# Altium PCB Dashboard_10.0.PcbDoc (part 2 of 3)
Units mm, origin at the board's own origin, x right, y up, seen from the top; angles counter-clockwise.
Board outline 113 x 67 mm, 2 copper layers (Top Layer, Bottom Layer), stack 1.671 mm thick; 178 components, 204 nets, 614 pads, 115 vias.
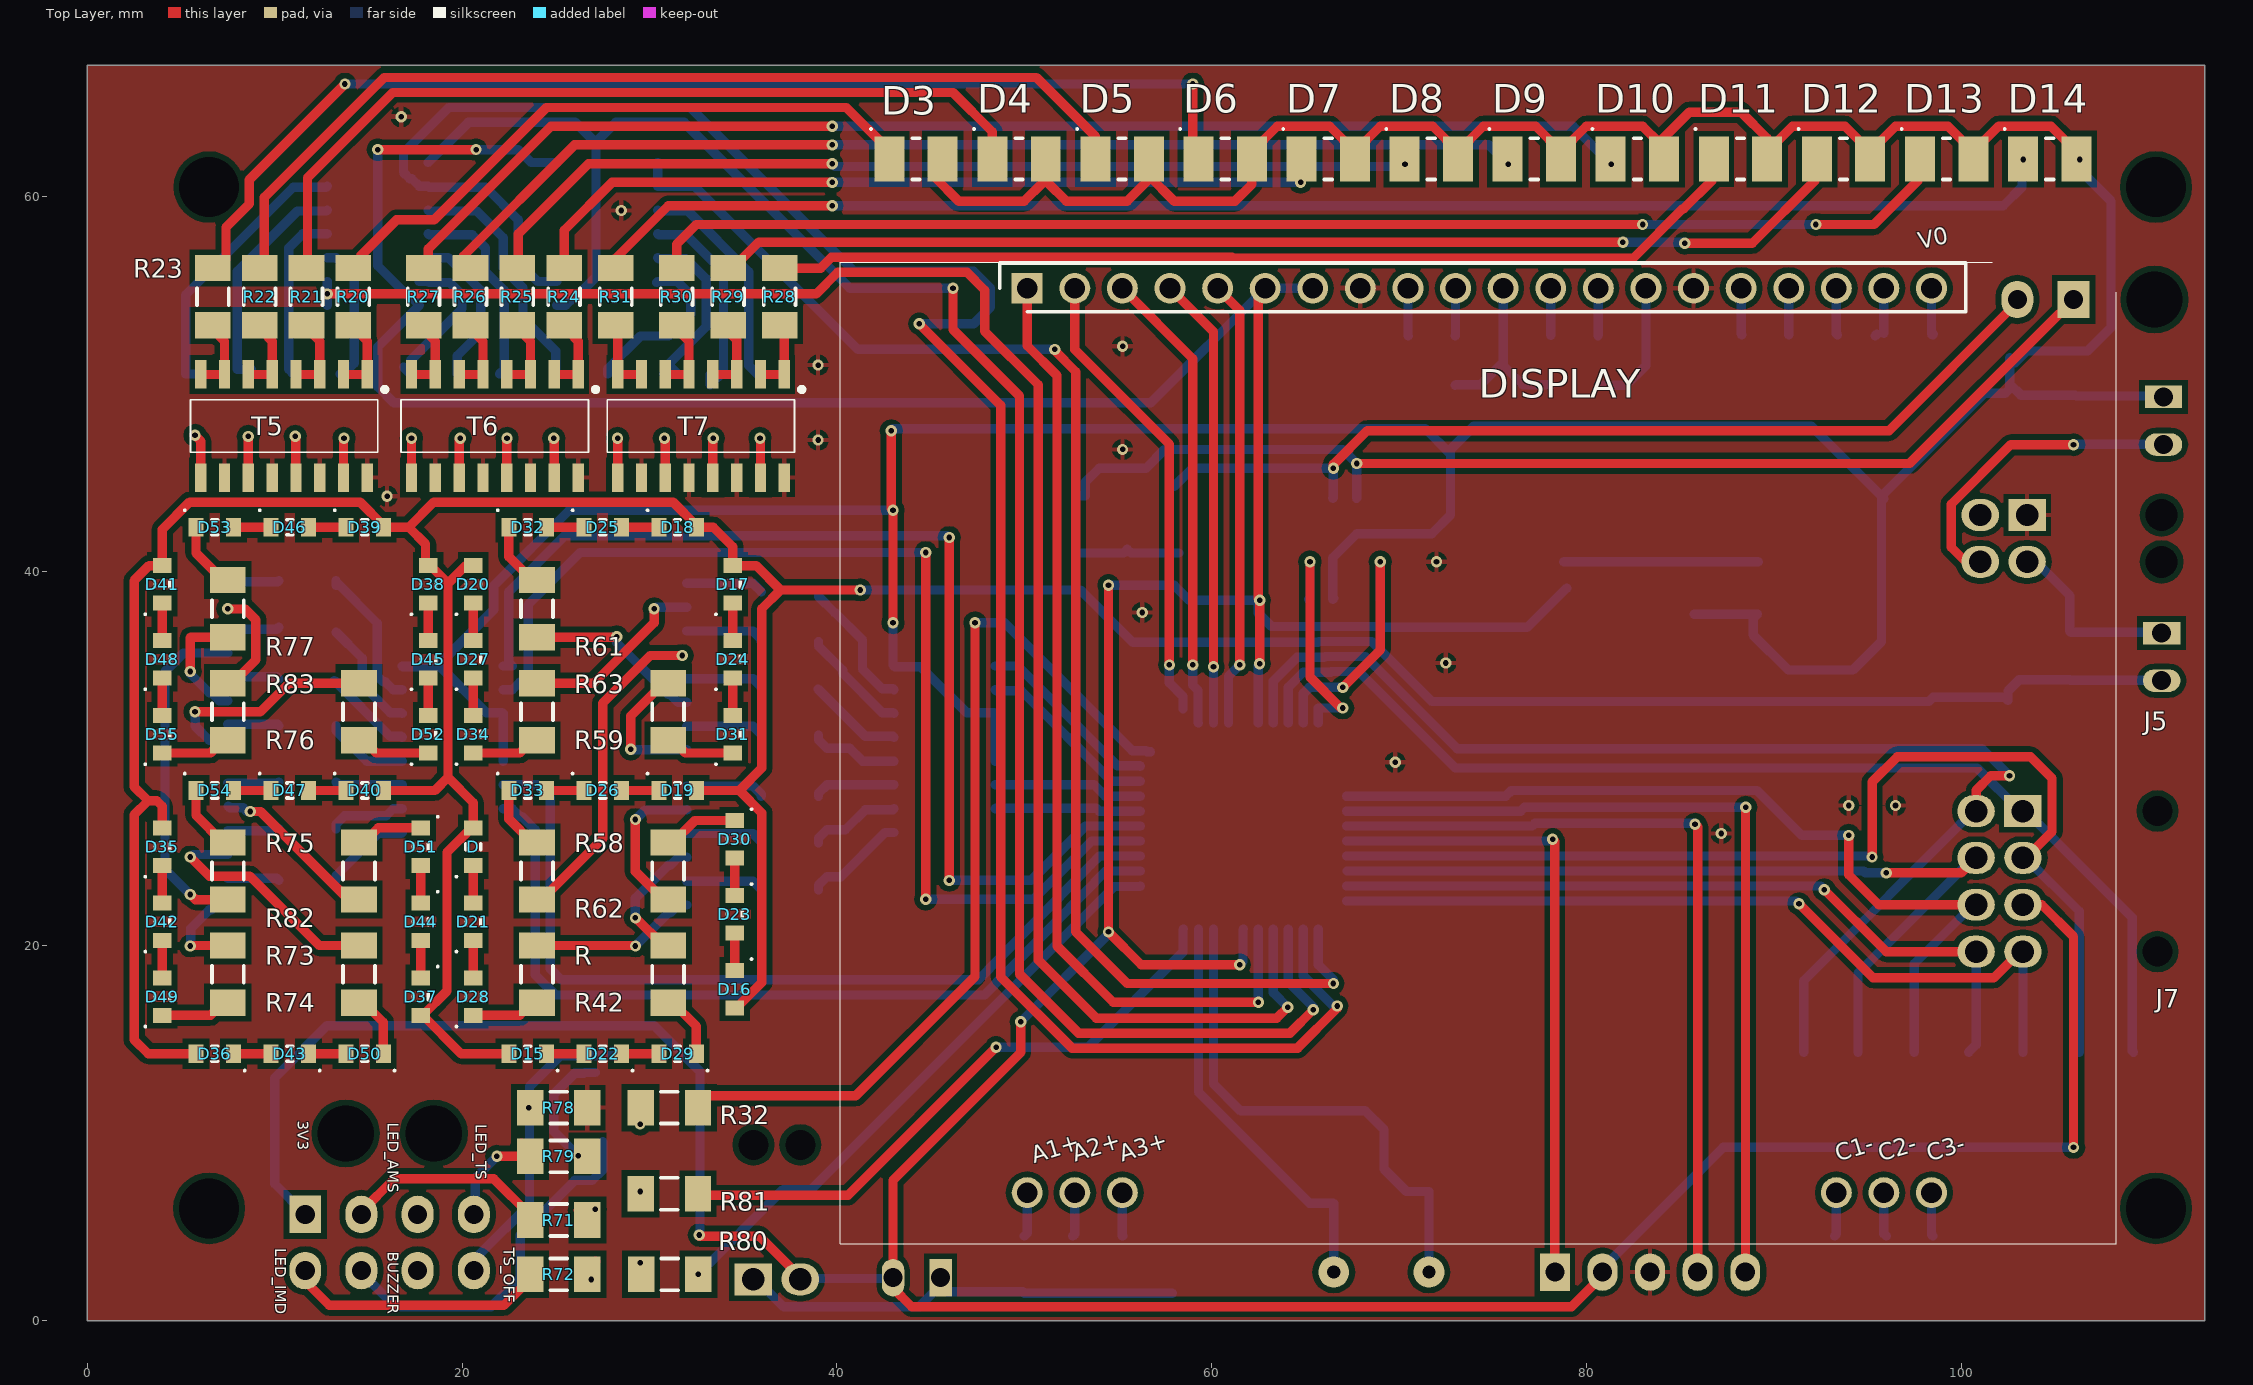
[diagram p0: Top Layer view]

## Part data (continued)
J9: library part HEADER_J9, "CONN HEADER R/A 2POS 2.5MM", Color=Black, Manufacturer 1=Molex, Supplier Part Number 1=1225083, ComponentLink1Description=http://www.farnell.com/datasheets/2221462.pdf?src-supplier=Farnell, ComponentLink1URL=http://www.farnell.com/datasheets/2221462.pdf?src-supplier=Farnell, ComponentLink2Description=http://www.farnell.com/datasheets/2059602.pdf?src-supplier=Element14, ComponentLink2URL=http://www.farnell.com/datasheets/2059602.pdf?src-supplier=Element14, ComponentLink3Description=http://www.farnell.com/datasheets/2221462.pdf?src-supplier=Newark, ComponentLink3URL=http://www.farnell.com/datasheets/2221462.pdf?src-supplier=Newark, ComponentLink4Description=https://www.molex.com/pdm_docs/sd/1053131102_sd.pdf?src-supplier=Digi-Key, ComponentLink4URL=https://www.molex.com/pdm_docs/sd/1053131102_sd.pdf?src-supplier=Digi-Key, Contact Material=Brass, Contact Plating=Gold, Gender=Male, Manufacturer Part Number 1=105313-1202, Mount="Through Hole", Number of Pins=2, Number of Rows=1, Pricing 1="10=0,81300, 50=0,47400, 200=0,46200, 500=0,45000 (EUR)", REACH SVHC=Unknown, RoHS=No, Stock 1=130, Supplier 1=RSComponents, Termination="Through Hole"
PIC18LF4685-I/PT: "IC MCU 8BIT 96KB FLASH 44TQFP", Case/Package=TQFP, Frequency=40MHz, Manufacturer 1=Microchip, Max Operating Temperature=85°C, Max Power Dissipation=1W, Max Supply Voltage=5.5V, Min Operating Temperature=-40°C, Min Supply Voltage=2V, Package Quantity=160, Supplier Part Number 1=PIC18LF4685-I/PT-ND, Access Time=40us, ComponentLink1Description=DATASHEET, ComponentLink1URL=https://datasheet.ciiva.com/9230/jp026433-9230074.pdf?src-supplier=Avnet, Core Architecture=PIC, Data Bus Width=8b, Height=1.05mm, Interface=I2C,SPI,CAN,UART,USART, Lead Free="Lead Free", Length=10mm, Manufacturer Part Number 1=PIC18LF4685-I/PT, Max Frequency=40MHz, Memory Size=96KB, Memory Type=FLASH, Mount="Surface Mount", Number of ADC Channels=11, Number of I2C Channels=1, Number of I/Os=36, Number of Pins=44, Number of Programmable I/O=44, Number of SPI Channels=1, Number of Timers/Counters=4, Number of UART Channels=1, Oscillator Type=Internal, Packaging=Tray, Peripherals="PWM,I2C,Brown-out Detect/Reset,POR,WDT,HLVD", Pricing 1="1=8,79000, 25=8,06000 (USD)", Radiation Hardening=No, RAM Size=3.25KB, REACH SVHC="No SVHC", RoHS=Yes, Stock 1=53, Supplier 1=Digi-Key, Watchdog Timer=Yes, Width=10mm
"Pickit 3": library part HEADER_J1, "Conn Unshrouded Header HDR 5 POS 2.54mm Solder RA Thru-Hole", Manufacturer 1=Samtec, Manufacturer Part Number 1=TLW-105-01-G-S-RA, Supplier Part Number 1=TLW-105-01-G-S-RA-ND, ComponentLink1Description=https://datasheet.ciiva.com/10350/mtlw-th-10350142.pdf?src-supplier=Avnet, ComponentLink1URL=https://datasheet.ciiva.com/10350/mtlw-th-10350142.pdf?src-supplier=Avnet, Contact Plating=Gold, Gender=Male, Mount="Through Hole", Number of Contacts=5, Number of Rows=1, Packaging=Bulk, Pitch=2.54mm, Pricing 1="1=1,20000 (USD)", Radiation Hardening=No, RoHS=Yes, Stock 1=950, Supplier 1=Digi-Key, Termination=Solder
R R20 R21 R22 R23 R24 R25 R26 R27 R28 R29 R30 R31 R42 R58 R59 R61 R62 R63 R71 R72 R73 R74 R75 R76 R77 R79 R82 R83 R200 R201: library part "RESISTOR 150R", "RES SMD 150 OHM 5% 1/4W 1206", Case/Package=1206, Case Code (Metric)=3216, Manufacturer 1=Panasonic, Max Operating Temperature=155°C, Max Power Dissipation=250mW, Min Operating Temperature=-55°C, Package Quantity=1, Resistance=150R, Supplier Part Number 1=P150ECT-ND, Temperature Coefficient=200ppm/°C, Tolerance=5%, Voltage Rating=200V, Case Code (Imperial)=1206, ComponentLink1Description=https://datasheet.ciiva.com/34303/1990341-34303679.pdf?src-supplier=Jameco, ComponentLink1URL=https://datasheet.ciiva.com/34303/1990341-34303679.pdf?src-supplier=Jameco, ComponentLink2Description=https://datasheet.ciiva.com/30146/4aoa0000ce1-30146493.pdf?src-supplier=Onlinecomponents.com, ComponentLink2URL=https://datasheet.ciiva.com/30146/4aoa0000ce1-30146493.pdf?src-supplier=Onlinecomponents.com, ComponentLink3Description=https://datasheet.ciiva.com/16771/70255313-16771855.pdf?src-supplier=Allied+Electronics, ComponentLink3URL=https://datasheet.ciiva.com/16771/70255313-16771855.pdf?src-supplier=Allied+Electronics, ComponentLink4Description=https://datasheet.ciiva.com/16773/70255313-16773382.pdf?src-supplier=Allied+Electronics, ComponentLink4URL=https://datasheet.ciiva.com/16773/70255313-16773382.pdf?src-supplier=Allied+Electronics, ComponentLink5Description=https://datasheet.ciiva.com/6082/1500035-6082279.pdf?src-supplier=Farnell, ComponentLink5URL=https://datasheet.ciiva.com/6082/1500035-6082279.pdf?src-supplier=Farnell, ComponentLink6Description=https://datasheet.ciiva.com/17207/aoa0000ce1-17207400.pdf?src-supplier=Avnet+Europe, ComponentLink6URL=https://datasheet.ciiva.com/17207/aoa0000ce1-17207400.pdf?src-supplier=Avnet+Europe, ComponentLink7Description=https://datasheet.ciiva.com/46377/1500035-46377050.pdf?src-supplier=Element14, ComponentLink7URL=https://datasheet.ciiva.com/46377/1500035-46377050.pdf?src-supplier=Element14, ComponentLink8Description=https://datasheet.ciiva.com/9185/aoa0000ce1-9185516.pdf?src-supplier=Avnet, ComponentLink8URL=https://datasheet.ciiva.com/9185/aoa0000ce1-9185516.pdf?src-supplier=Avnet, ComponentLink9Description=https://datasheet.ciiva.com/16513/aoa0000ce1-16513711.pdf?src-supplier=Avnet+Asia, ComponentLink9URL=https://datasheet.ciiva.com/16513/aoa0000ce1-16513711.pdf?src-supplier=Avnet+Asia, Composition="Thick Film", Contact Plating=Tin, Depth=1.6mm, Features="Automotive AEC-Q200", Height=0.6mm, Lead Free="Lead Free", Length=3.2mm, Manufacturer Part Number 1=ERJ-8GEYJ151V, Military Standard=Not, Mount="Surface Mount", Number of Terminations=2, Packaging="Tape and Reel", Power Rating=250mW, Pricing 1="1=0,10000, 10=0,06500, 100=0,02660, 1000=0,01195, 2500=0,01037 (USD)", Radiation Hardening=No, REACH SVHC="No SVHC", RoHS=Yes, Stock 1=112821, Supplier 1=Digi-Key, Termination=SMD/SMT, Voltage Rating (DC)=200V, Weight=0.000571oz, Width=1.6mm
R1 R2 R3 R4 R5 R6 R7 R70 R78: library part "RESISTOR 10K", "RES SMD 10K OHM 5% 1/4W 1206", Case/Package=1206, Case Code (Metric)=3216, Manufacturer 1="Vishay Dale", Manufacturer Part Number 1=CRCW120610K0JNTA, Max Operating Temperature=155°C, Max Power Dissipation=250mW, Min Operating Temperature=-55°C, Package Quantity=5000, Resistance=10kR, Temperature Coefficient=200ppm/°C, Tolerance=5%, Voltage Rating=200V, Case Code (Imperial)=1206, ComponentLink1Description=https://datasheet.ciiva.com/2567/dcrcw-2567803.pdf?src-supplier=Digi-Key, ComponentLink1URL=https://datasheet.ciiva.com/2567/dcrcw-2567803.pdf?src-supplier=Digi-Key, ComponentLink2Description=https://datasheet.ciiva.com/9052/dcrcw-9052558.pdf?src-supplier=Avnet, ComponentLink2URL=https://datasheet.ciiva.com/9052/dcrcw-9052558.pdf?src-supplier=Avnet, Composition="Thick Film", Contact Plating=Tin,Lead, Depth=1.6mm, Features="Automotive AEC-Q200", Height=0.024inch, Lead Free="Contains Lead", Length=3.2mm, Military Standard=Not, Number of Terminations=2, Packaging="Tape and Reel", Power Dissipation=250mW, Power Rating=250mW, Pricing 1="5000=0,02620, 10000=0,02542, 20000=0,02439, 30000=0,02372, 50000=0,02308 (USD)", Radiation Hardening=No, RoHS=Yes, Stock 1=5000, Supplier 1=Avnet, Supplier Part Number 1=CRCW120610K0JNTA, Termination=SMD/SMT, Voltage Rating (DC)=200V, Weight=0.000353oz, Width=0.063inch
R12 R32 R33 R34 R35 R36 R37 R38 R39 R40 R41 R43 R44 R45 R46 R47 R48 R49 R50 R51 R52 R53 R54 R55 R56 R57 R60 R80 R81: library part "RESISTOR 1K", "Res Thick Film 1206(3216) 1K Ohm 5% 1/4W 200ppm/C Molded SMD Punched Carrier T/R", Case/Package=1206, Case Code (Metric)=3216, Manufacturer 1=Panasonic, Max Operating Temperature=155°C, Max Power Dissipation=250mW, Min Operating Temperature=-55°C, Package Quantity=1, Resistance=1kR, Supplier Part Number 1=P1.0KECT-ND, Temperature Coefficient=200ppm/°C, Tolerance=5%, Voltage Rating=200V, Case Code (Imperial)=1206, Categoría=Resistencia, ComponentLink1Description=https://datasheet.ciiva.com/24069/aoa0000ce1-37422-24069653.pdf?src-supplier=Mouser, ComponentLink1URL=https://datasheet.ciiva.com/24069/aoa0000ce1-37422-24069653.pdf?src-supplier=Mouser, ComponentLink2Description=https://datasheet.ciiva.com/30141/4aoa0000ce1-30141014.pdf?src-supplier=Onlinecomponents.com, ComponentLink2URL=https://datasheet.ciiva.com/30141/4aoa0000ce1-30141014.pdf?src-supplier=Onlinecomponents.com, ComponentLink3Description=https://datasheet.ciiva.com/43460/1500035-43460230.pdf?src-supplier=Farnell, ComponentLink3URL=https://datasheet.ciiva.com/43460/1500035-43460230.pdf?src-supplier=Farnell, ComponentLink4Description=https://datasheet.ciiva.com/17215/aoa0000ce1-17215321.pdf?src-supplier=Avnet+Europe, ComponentLink4URL=https://datasheet.ciiva.com/17215/aoa0000ce1-17215321.pdf?src-supplier=Avnet+Europe, ComponentLink5Description=https://datasheet.ciiva.com/46371/1500035-46371931.pdf?src-supplier=Element14, ComponentLink5URL=https://datasheet.ciiva.com/46371/1500035-46371931.pdf?src-supplier=Element14, ComponentLink6Description=https://datasheet.ciiva.com/28532/1678796-28532156.pdf?src-supplier=Element14, ComponentLink6URL=https://datasheet.ciiva.com/28532/1678796-28532156.pdf?src-supplier=Element14, ComponentLink7Description=https://datasheet.ciiva.com/46386/1500035-46386461.pdf?src-supplier=Element14, ComponentLink7URL=https://datasheet.ciiva.com/46386/1500035-46386461.pdf?src-supplier=Element14, ComponentLink8Description=https://datasheet.ciiva.com/48532/aoa0000ce1-48532159.pdf?src-supplier=Avnet, ComponentLink8URL=https://datasheet.ciiva.com/48532/aoa0000ce1-48532159.pdf?src-supplier=Avnet, Composition="Thick Film", Contact Plating=Tin, Depth=1.6mm, Features="Automotive AEC-Q200", Height=0.6mm, Lead Free="Lead Free", Length=3.2mm, Manufacturer Part Number 1=ERJ-8GEYJ102V, Military Standard=Not, Mount="Surface Mount", Number of Terminations=2, Packaging="Tape and Reel", Power Rating=250mW, Pricing 1="1=0,10000, 10=0,07400, 100=0,03010, 1000=0,01351, 2500=0,01172 (USD)", Radiation Hardening=No, REACH SVHC=Unknown, RoHS=Yes, Stock 1=1414216, Supplier 1=Digi-Key, Termination=SMD/SMT, Voltage Rating (DC)=200V, Width=0.063inch
R64 R65 R66 R67 R68 R69: library part "RESISTOR 70R", "Res Thick Film 1206(3216) 70 Ohm 5% 1/4W 200ppm/C Molded SMD Punched Carrier T/R", Case/Package=1206, Case Code (Metric)=3216, Manufacturer 1=Panasonic, Max Operating Temperature=155°C, Max Power Dissipation=250mW, Min Operating Temperature=-55°C, Package Quantity=1, Resistance=1kR, Supplier Part Number 1=P1.0KECT-ND, Temperature Coefficient=200ppm/°C, Tolerance=5%, Voltage Rating=200V, Case Code (Imperial)=1206, Categoría=Resistencia, ComponentLink1Description=https://datasheet.ciiva.com/24069/aoa0000ce1-37422-24069653.pdf?src-supplier=Mouser, ComponentLink1URL=https://datasheet.ciiva.com/24069/aoa0000ce1-37422-24069653.pdf?src-supplier=Mouser, ComponentLink2Description=https://datasheet.ciiva.com/30141/4aoa0000ce1-30141014.pdf?src-supplier=Onlinecomponents.com, ComponentLink2URL=https://datasheet.ciiva.com/30141/4aoa0000ce1-30141014.pdf?src-supplier=Onlinecomponents.com, ComponentLink3Description=https://datasheet.ciiva.com/43460/1500035-43460230.pdf?src-supplier=Farnell, ComponentLink3URL=https://datasheet.ciiva.com/43460/1500035-43460230.pdf?src-supplier=Farnell, ComponentLink4Description=https://datasheet.ciiva.com/17215/aoa0000ce1-17215321.pdf?src-supplier=Avnet+Europe, ComponentLink4URL=https://datasheet.ciiva.com/17215/aoa0000ce1-17215321.pdf?src-supplier=Avnet+Europe, ComponentLink5Description=https://datasheet.ciiva.com/46371/1500035-46371931.pdf?src-supplier=Element14, ComponentLink5URL=https://datasheet.ciiva.com/46371/1500035-46371931.pdf?src-supplier=Element14, ComponentLink6Description=https://datasheet.ciiva.com/28532/1678796-28532156.pdf?src-supplier=Element14, ComponentLink6URL=https://datasheet.ciiva.com/28532/1678796-28532156.pdf?src-supplier=Element14, ComponentLink7Description=https://datasheet.ciiva.com/46386/1500035-46386461.pdf?src-supplier=Element14, ComponentLink7URL=https://datasheet.ciiva.com/46386/1500035-46386461.pdf?src-supplier=Element14, ComponentLink8Description=https://datasheet.ciiva.com/48532/aoa0000ce1-48532159.pdf?src-supplier=Avnet, ComponentLink8URL=https://datasheet.ciiva.com/48532/aoa0000ce1-48532159.pdf?src-supplier=Avnet, Composition="Thick Film", Contact Plating=Tin, Depth=1.6mm, Features="Automotive AEC-Q200", Height=0.6mm, Lead Free="Lead Free", Length=3.2mm, Manufacturer Part Number 1=ERJ-8GEYJ102V, Military Standard=Not, Mount="Surface Mount", Number of Terminations=2, Packaging="Tape and Reel", Power Rating=250mW, Pricing 1="1=0,10000, 10=0,07400, 100=0,03010, 1000=0,01351, 2500=0,01172 (USD)", Radiation Hardening=No, REACH SVHC=Unknown, RoHS=Yes, Stock 1=1414216, Supplier 1=Digi-Key, Termination=SMD/SMT, Voltage Rating (DC)=200V, Width=0.063inch
T4: library part TRANSISTOR_BUZZ, "TRANS NPN 45V 0.5A SOT23", Case/Package=SOT-23-3, Collector Base Voltage (VCBO)=50V, Collector Emitter Breakdown Voltage=45V, Collector Emitter Saturation Voltage=700mV, Current Rating=500mA, Emitter Base Voltage (VEBO)=5V, Frequency=100MHz, Manufacturer 1="ON Semiconductor", Max Operating Temperature=150°C, Max Power Dissipation=300mW, Min Operating Temperature=-55°C, Package Quantity=1, Supplier Part Number 1=BC817-25LT1GOSCT-ND, Collector Emitter Voltage (VCEO)=45V, ComponentLink1Description=https://datasheet.ciiva.com/15138/getdatasheetpartid-38405-15138602.pdf?src-supplier=Verical, ComponentLink1URL=https://datasheet.ciiva.com/15138/getdatasheetpartid-38405-15138602.pdf?src-supplier=Verical, ComponentLink2Description=https://datasheet.ciiva.com/27748/2010413-27748829.pdf?src-supplier=Jameco, ComponentLink2URL=https://datasheet.ciiva.com/27748/2010413-27748829.pdf?src-supplier=Jameco, ComponentLink3Description=https://datasheet.ciiva.com/1195/bc817-16lt1-d-1195763.pdf?src-supplier=Element14, ComponentLink3URL=https://datasheet.ciiva.com/1195/bc817-16lt1-d-1195763.pdf?src-supplier=Element14, ComponentLink4Description=https://datasheet.ciiva.com/976/bc817-16lt1-d-976356.pdf?src-supplier=Digi-Key, ComponentLink4URL=https://datasheet.ciiva.com/976/bc817-16lt1-d-976356.pdf?src-supplier=Digi-Key, ComponentLink5Description=https://datasheet.ciiva.com/1195/bc817-16lt1-d-1195764.pdf?src-supplier=Element14, ComponentLink5URL=https://datasheet.ciiva.com/1195/bc817-16lt1-d-1195764.pdf?src-supplier=Element14, ComponentLink6Description=https://datasheet.ciiva.com/976/bc817-16lt1-d-976357.pdf?src-supplier=Digi-Key, ComponentLink6URL=https://datasheet.ciiva.com/976/bc817-16lt1-d-976357.pdf?src-supplier=Digi-Key, ComponentLink7Description=https://datasheet.ciiva.com/4722/bc817-16lt1-d-104560-4722229.pdf?src-supplier=Mouser, ComponentLink7URL=https://datasheet.ciiva.com/4722/bc817-16lt1-d-104560-4722229.pdf?src-supplier=Mouser, ComponentLink8Description=https://datasheet.ciiva.com/22641/bc817-16lt1-d-22641013.pdf?src-supplier=Farnell, ComponentLink8URL=https://datasheet.ciiva.com/22641/bc817-16lt1-d-22641013.pdf?src-supplier=Farnell, ComponentLink9Description=https://datasheet.ciiva.com/22664/1842041-22664101.pdf?src-supplier=Element14, ComponentLink9URL=https://datasheet.ciiva.com/22664/1842041-22664101.pdf?src-supplier=Element14, ComponentLink10Description=https://datasheet.ciiva.com/976/bc817-16lt1-d-976358.pdf?src-supplier=Digi-Key, ComponentLink10URL=https://datasheet.ciiva.com/976/bc817-16lt1-d-976358.pdf?src-supplier=Digi-Key, ComponentLink11Description=https://datasheet.ciiva.com/25996/bc817-16lt1-d-25996327.pdf?src-supplier=Avnet+Europe, ComponentLink11URL=https://datasheet.ciiva.com/25996/bc817-16lt1-d-25996327.pdf?src-supplier=Avnet+Europe, ComponentLink12Description=https://datasheet.ciiva.com/11197/bc817-16lt1-d-11197514.pdf?src-supplier=Avnet, ComponentLink12URL=https://datasheet.ciiva.com/11197/bc817-16lt1-d-11197514.pdf?src-supplier=Avnet, ComponentLink13Description=https://datasheet.ciiva.com/22664/bc817-16lt1-d-22664204.pdf?src-supplier=Element14, ComponentLink13URL=https://datasheet.ciiva.com/22664/bc817-16lt1-d-22664204.pdf?src-supplier=Element14, ComponentLink14Description=https://datasheet.ciiva.com/1196/bc817-16lt1-d-1196558.pdf?src-supplier=Element14, ComponentLink14URL=https://datasheet.ciiva.com/1196/bc817-16lt1-d-1196558.pdf?src-supplier=Element14, Contact Plating=Tin,Matte, Element Configuration=Single, Gain Bandwidth Product=100MHz, Halogen Free="Halogen Free", Height=0.94mm, hFE Min=160, Lead Free="Lead Free", Length=2.9mm, Manufacturer Part Number 1=BC817-25LT1G, Max Breakdown Voltage=45V, Max Collector Current=500mA, Max Frequency=100MHz, Number of Elements=1, Number of Pins=3, Packaging="Tape and Reel", Polarity=NPN, Power Dissipation=300mW, Pricing 1="1=0,15000, 10=0,14100, 100=0,05890, 500=0,04626, 1000=0,03213 (USD)", Radiation Hardening=No, REACH SVHC="No SVHC", RoHS=Yes, Stock 1=103204, Supplier 1=Digi-Key, Transition Frequency=100MHz, Width=1.3mm
T5 T6 T7: "TRANS 4NPN 40V 0.5A 16SOIC", Case/Package=SOIC, Collector Base Voltage (VCBO)=75V, Collector Emitter Breakdown Voltage=40V, Collector Emitter Saturation Voltage=1V, Emitter Base Voltage (VEBO)=5V, Frequency=300MHz, Manufacturer 1="ON Semiconductor / Fairchild", Max Collector Current=500mA, Max Operating Temperature=150°C, Max Power Dissipation=1W, Min Operating Temperature=-55°C, Package Quantity=1, Supplier Part Number 1=MMPQ2222ACT-ND, Collector Emitter Voltage (VCEO)=40V, Gain Bandwidth Product=350MHz, Height=1.5mm, hFE Min=100, Lead Free="Lead Free", Length=10mm, Manufacturer Part Number 1=MMPQ2222A, Max Breakdown Voltage=40V, Max Frequency=300MHz, Mount="Surface Mount", Number of Elements=4, Number of Pins=16, Packaging="Tape and Reel", Polarity=NPN, Power Dissipation=1W, Pricing 1="1=1,81000, 10=1,62600, 100=1,19650, 500=1,01240, 1000=0,85900 (USD)", Radiation Hardening=No, REACH SVHC="No SVHC", RoHS=Yes, Stock 1=16456, Supplier 1=Digi-Key, Transition Frequency=300MHz, Weight=0.143g, Width=4mm
  T5: ComponentLink5Description=DATASHEET, ComponentLink5URL=https://datasheet.ciiva.com/968/ffb2222a-968058.pdf?src-supplier=Digi-Key
  T6 T7: ComponentLink1Description=DATASHEET, ComponentLink1URL=https://datasheet.ciiva.com/968/ffb2222a-968058.pdf?src-supplier=Digi-Key
T10 T11 T12 T13: "Bipolar Transistors - BJT 200mA 40V PNP", Case/Package=SOIC, Collector Base Voltage (VCBO)=-40V, Collector Emitter Breakdown Voltage=40V, Collector Emitter Saturation Voltage=-100mV, Current Rating=-200mA, Emitter Base Voltage (VEBO)=-5V, Frequency=200MHz, Manufacturer 1="ON Semiconductor / Fairchild", Max Collector Current=200mA, Max Operating Temperature=150°C, Max Power Dissipation=1W, Min Operating Temperature=-55°C, Package Quantity=2500, Supplier Part Number 1=MMPQ3906CT-ND, Collector Emitter Voltage (VCEO)=40V, ComponentLink1Description=DATASHEET, ComponentLink1URL=https://datasheet.ciiva.com/4721/mmpq3906-196132-4721366.pdf?src-supplier=Mouser, Gain Bandwidth Product=200MHz, Height=1.5mm, hFE Min=75, Lead Free="Lead Free", Length=10mm, Manufacturer Part Number 1=MMPQ3906, Max Breakdown Voltage=40V, Max Frequency=200MHz, Mount="Surface Mount", Number of Elements=4, Number of Pins=16, Packaging="Tape and Reel", Polarity=PNP, Power Dissipation=1W, Pricing 1="1=1,73000, 10=1,55400, 100=1,14340, 500=0,96752, 1000=0,82093 (USD)", Radiation Hardening=No, REACH SVHC="No SVHC", RoHS=Yes, Stock 1=819, Supplier 1=Digi-Key, Transition Frequency=200MHz, Voltage Rating (DC)=-40V, Weight=0.143g, Width=4mm
T14 T15 T16: library part TRANSISTOR, "MOSFET N-CH 35V 3A CPH3", Case/Package=SC, Continuous Drain Current (ID)=3A, Drain to Source Breakdown Voltage=35V, Drain to Source Resistance=108mR, Gate to Source Voltage (Vgs)=20V, Input Capacitance=186pF, Manufacturer 1="ON Semiconductor", Max Operating Temperature=150°C, Max Power Dissipation=1W, Min Operating Temperature=-55°C, Package Quantity=3000, Supplier Part Number 1=8009989, Category=Transistor, ComponentLink1Description=https://datasheet.ciiva.com/4444/cph3455-d-91653-4444616.pdf?src-supplier=Mouser, ComponentLink1URL=https://datasheet.ciiva.com/4444/cph3455-d-91653-4444616.pdf?src-supplier=Mouser, ComponentLink2Description=https://datasheet.ciiva.com/11164/cph3455-d-11164889.pdf?src-supplier=Avnet, ComponentLink2URL=https://datasheet.ciiva.com/11164/cph3455-d-11164889.pdf?src-supplier=Avnet, ComponentLink3Description=https://datasheet.ciiva.com/947/cph3455-d-947201.pdf?src-supplier=Digi-Key, ComponentLink3URL=https://datasheet.ciiva.com/947/cph3455-d-947201.pdf?src-supplier=Digi-Key, Drain to Source Voltage (Vdss)=35V, Element Configuration=Single, Fall Time=5.7ns, Halogen Free="Halogen Free", Height=0.9mm, Lead Free="Lead Free", Length=2.9mm, Manufacturer Part Number 1=CPH3455-TL-H, Number of Pins=3, Packaging="Tape and Reel", Power Dissipation=1W, Pricing 1="50=0,09600, 100=0,16000, 250=0,15300, 500=0,14600, 1000=0,11600 (EUR)", Rds On Max=104mR, Rise Time=4.7ns, RoHS=Yes, Stock 1=2250, Supplier 1=RSComponents, Turn-Off Delay Time=15ns, Turn-On Delay Time=4.2ns, Width=1.6mm
U1a U4a: "IC, SHIFT REGISTER, SMD, 74HC164", Case/Package=SOIC, Manufacturer 1="Texas Instruments", Max Operating Temperature=125°C, Max Supply Voltage=6V, Min Operating Temperature=-40°C, Min Supply Voltage=2V, Operating Supply Voltage=5V, Package Quantity=50, Supplier Part Number 1=296-8247-5-ND, ComponentLink1Description=DATASHEET, ComponentLink1URL=https://datasheet.ciiva.com/15093/getdatasheetpartid-81705-15093317.pdf?src-supplier=Verical, Direction=Unidirectional, Height=1.58mm, Lead Free="Lead Free", Length=8.65mm, Logic Function="Shift Register", Manufacturer Part Number 1=SN74HC164D, Mount="Surface Mount", Number of Bits=8, Number of Bits per Element=8, Number of Circuits=1, Number of Elements=1, Number of Input Lines=2, Number of Output Lines=8, Number of Pins=14, Packaging=Rail/Tube, Pricing 1="1=0,39000, 10=0,33800, 25=0,31520, 100=0,25200, 250=0,23400, 500=0,19800, 1000=0,15300, 2500=0,13950, 5000=0,13050 (USD)", Propagation Delay=30ns, Radiation Hardening=No, REACH SVHC="No SVHC", RoHS=Yes, Stock 1=1795, Supplier 1=Digi-Key, Turn-On Delay Time=255ns, Weight=0.004318oz, Width=3.91mm
U2a U3a: "TEXAS INSTRUMENTS         SN74LS47D            LOGIC, BCD TO 7-SEG DECODER, 16SOIC", Case/Package=D, High Level Output Current=-50uA, Low Level Output Current=3.2mA, Manufacturer 1="Texas Instruments", Max Input Voltage=5.25V, Max Operating Temperature=70°C, Min Input Voltage=4.75V, Min Operating Temperature=0°C, Operating Supply Current=7mA, Operating Supply Voltage=5V, Package Quantity=40, Supplier Part Number 1=296-3711-5-ND, Bandwidth=35MHz, ComponentLink1Description=DATASHEET, ComponentLink1URL=https://datasheet.ciiva.com/15092/getdatasheetpartid-251224-15092377.pdf?src-supplier=Verical, Contact Plating=Gold, Height=1.5mm, Lead Free="Lead Free", Length=10mm, Logic Function=Demultiplexer,Decoder, Manufacturer Part Number 1=SN74LS47D, Max Supply Voltage=5.25V, Min Supply Voltage=4.75V, Number of Bits=7, Number of Channels=1, Number of Circuits=1, Number of Elements=1, Number of Input Lines=4, Number of Inputs=4, Number of Output Lines=7, Number of Outputs=7, Number of Pins=16, Packaging=Rail/Tube, Polarity=Inverting, Pricing 1="1=1,85000, 10=1,66200, 25=1,56760, 100=1,33550, 250=1,25400, 500=1,09726, 1000=0,90915, 2500=0,84645, 5000=0,81510 (USD)", Propagation Delay=100ns, Quiescent Current=7mA, Radiation Hardening=No, REACH SVHC="No SVHC", RoHS=Yes, Stock 1=475, Supplier 1=Digi-Key, Turn-On Delay Time=100ns, Weight=0.004998oz, Width=4mm
U5: library part MCP2551, "MICROCHIP - MCP2551-I/SN - HI SPEED TRANSCEIVER CAN CMS 2551", Case/Package=SOIC, Manufacturer 1=Microchip, Manufacturer Part Number 1=MCP2551-I/SN, Max Operating Temperature=85°C, Max Supply Current=75mA, Max Supply Voltage=5.5V, Min Operating Temperature=-40°C, Min Supply Voltage=4.5V, Operating Supply Voltage=5V, Package Quantity=100, Supplier Part Number 1=MCP2551-I/SN-ND, ComponentLink1Description=DATASHEET, ComponentLink1URL=https://html.alldatasheet.com/html-pdf/514790/MICROCHIP/MCP2561/486/1/MCP2561.html, Contact Plating=Tin,Matte, Data Rate=1Mbps, Height=1.25mm, Interface=CAN, Lead Free="Lead Free", Length=4.9mm, Logic Function=Transceiver, Mount="Surface Mount", Nominal Supply Current=75mA, Number of Drivers=1, Number of Pins=8, Number of Receive Buffers=1, Number of Receivers=1, Number of Terminals=8, Number of Transceivers=1, Number of Transmit Buffers=1, Packaging=Rail/Tube, Pricing 1="1=1,02000, 25=0,85000 (USD)", Radiation Hardening=No, REACH SVHC="No SVHC", RoHS=Yes, Slew Rate=8.5V/µs, Stock 1=18330, Supplier 1=Digi-Key, Width=3.9mm
U6: library part REGULADOR, "IC REG LDO 3.3V 1.5A D2PAK", Case/Package=M, Dropout Voltage=1.3V, Manufacturer 1="Analog Devices / Linear Technology", Max Input Voltage=25V, Max Operating Temperature=150°C, Max Output Current=1.5A, Min Input Voltage=2.55V, Min Operating Temperature=0°C, Operating Supply Current=5mA, Output Voltage=3.3V, Package Quantity=50, Power Dissipation=15W, Power Supply Rejection Ratio (PSRR)=72dB, Quiescent Current=10mA, Category=Regulador, ComponentLink1Description=DATASHEET, ComponentLink1URL=https://datasheet.ciiva.com/2058/1722-2058517.pdf?src-supplier=Digi-Key, Height=4.57mm, Lead Free="Contains Lead", Length=10.54mm, Manufacturer Part Number 1=LT1086CM-3.3, Min Current Limit=1.5A, Number of Outputs=1, Number of Pins=3, Number of Regulators=1, Output Current=1.5A, Output Type=Fixed, Packaging=Rail/Tube, Polarity=Positive, Pricing 1="1=11,36990, 25=7,21000, 100=5,40000, 500=4,32000, 1000=3,87000 (USD)", Radiation Hardening=No, RoHS=Yes, Stock 1=2286, Supplier 1=Arrow, Supplier Part Number 1=LT1086CM-3.3, Width=9.4mm
X2: library part "Fuse 1", "Fuse", LatestRevisionDate=17-Jul-2002, LatestRevisionNote="Re-released for DXP Platform.", PackageDescription="Thru-Hole; 2 Leads", PackageReference=PIN-W2/E2.8, Published=8-Jun-2000, Publisher="Altium Limited"

## Free pads (board coordinates)
  round 1.524 hole 3.2: 2(6.5,6) 2(6.5,60.5) 2(110.4,6) 2(110.4,60.5)

## Via types
v1: diameter 0.6, hole 0.3, Top Layer to Bottom Layer, 115 vias

## Nets (pads, with @x,y where several pads share a name; then routed paths per layer and width w, separated by ;. In a path a pad name is that pad's centre, name@x,y a point inside that pad or via, vN(x,y) a via of type N, cw(c..) or ccw(c..) an arc to the next point about the centre after c; other vN are vias at no path point)
3V3: "Pickit 3.2" C1.1 C5.2 DISPLAY.34 DISPLAY.35 J6.1 J7.3 J8.2 J9.2 PIC18LF4685-I/PT.7 PIC18LF4685-I/PT.28 U1a.14 U4a.14 U6.2 U6.4 | length 324.7
  Top Layer w0.5: v1(15.5,62.5) v1(20.75,62.5) ; v1@32.66,4.5 35.888,4.5 38.05,2.338 J9.2@38.05,2.21 J9.2@38.05,2.082 ; v1(49.821,15.957) 49.821,14.321 43,7.5 J8.2@43,2.3 43,1.75 44,0.75 79.21,0.75 80.86,2.4 80.86,2.6 ; v1(54.5,39.25) v1(54.5,20.75) 56.25,19 v1(61.5,19) ; v1(62.563,35.063) 62.569,35.069 62.569,38.444 v1(62.576,38.451) 62.5,38.527 62.5,54.74 DISPLAY.35@62.86,55.1 ; J7.3@103.3,22.2 104.3,22.2 106,20.5 v1(106,9.25)
  Bottom Layer w0.5: J6.1@11.63,5.675 10,7.306 10,12.957 12.793,15.75 30.25,15.75 32.7,13.3 v1@32.7,4.5 ; v1(15.5,62.5) 15.5,56.307 17.214,54.594 17.321,54.594 17.725,54.19 15.5,51.965 15.5,49.847 16.347,49 56.76,49 DISPLAY.35@62.86,55.1 DISPLAY.34@65.4,55.1 ; v1(20.75,62.5) 23,62.5 23.69,61.81 U1a.14@25.05,61.81 ; J9.2@38.05,2.21 38.095,2.255 42.955,2.255 J8.2@43,2.3 ; v1(49.821,15.957) 54.5,20.636 v1(54.5,20.75) ; v1(54.5,39.25) 58,39.25 58.799,38.451 C1.1@62.5,38.451 ; v1(61.5,19) 61.675,19.175 61.675,20.875 PIC18LF4685-I/PT.28@61.7,20.9 ; PIC18LF4685-I/PT.7@62.5,31.9 62.5,34.973 62.563,35.035 v1(62.563,35.063) ; v1(62.576,38.451) C1.1@62.5,38.451 ; U6.4@78.8,40.5 U6.2@85.75,40.5 C5.2@89.175,40.5 ; U6.4@78.95,39.1 76.85,37 68.934,37 68.884,37.05 63.2,37.05 62.5,37.75 C1.1@62.5,38.451 ; 80.86,2.6 80.86,2.8 87.31,9.25 v1(106,9.25)
  other v1: 32.66,4.575
5V: J3.2 J5.3 X1.2 | length 16.7
  Top Layer w0.5: J5.3@101.02,40.5 100.25,40.5 99.47,41.28 99.47,43.58 102.64,46.75 v1(106,46.75)
  Bottom Layer w0.5: X1.2@106.12,46.78 110.78,46.78 J3.2@110.8,46.76
12V: J2.1 J5.2 X2.2 | length 9.9
  Bottom Layer w0.5: J5.2@103.52,40.5 104,40.5 105.8,38.7 X2.2@105.8,36.8 105.85,36.75 110.65,36.75 J2.1@110.7,36.7
+5: C4.2 D2.1 D3.2 D4.2 D5.2 D6.2 D7.2 D8.2 D9.2 D10.2 D11.2 D12.2 D13.2 D14.2 J3.1 U2a.3 U2a.4 U2a.5 U2a.16 U3a.3 U3a.4 U3a.5 U3a.16 U5.3 U6.1 X1.1 | length 269.8
  Top Layer w0.5: v1(42.9,47.5) 42.9,43.35 v1(43,43.25) v1(43,37.25) ; D3.2@45.65,62 45.65,62.4 45.25,62 45.25,61 46.5,59.75 50,59.75 51,60.75 D4.2@51,61.25 ; D4.2@51.15,62 51.15,62.4 51,62.25 D4.2@51,61.25 ; D5.2@56.65,62.4 D5.2@56.65,62 D5.2@56.65,61.1 ; D7.2@67.65,62 D7.2@67.65,62.4 ; D8.2@73.15,62 D8.2@73.15,62.4 ; D9.2@78.65,62 D9.2@78.65,62.4 ; D10.2@84.15,62 D10.2@84.15,62.4 ; D11.2@89.65,62 D11.2@89.65,62.4 ; D12.2@95.15,62 D12.2@95.15,62.4 ; D13.2@100.65,62 D13.2@100.65,62.4 ; D14.2@106.15,62 106.15,62.4 104.8,63.75 102,63.75 D13.2@100.65,62.4 ; D4.2@51,61.25 51.25,61 51.25,60.75 52.25,59.75 55.5,59.75 56.65,60.9 D5.2@56.65,61.1 ; D5.2@56.65,61.1 58,59.75 61.25,59.75 62.15,60.65 D6.2@62.15,62 62.15,62.4 63.5,63.75 66.3,63.75 D7.2@67.65,62.4 ; D7.2@67.65,62.4 69,63.75 71.8,63.75 D8.2@73.15,62.4 ; D8.2@73.15,62.4 74.5,63.75 77.3,63.75 D9.2@78.65,62.4 ; D9.2@78.65,62.4 80,63.75 83,63.75 83.875,62.875 85.5,64.5 88.25,64.5 89.65,63.1 D11.2@89.65,62.4 ; D11.2@89.65,62.4 91,63.75 93.8,63.75 D12.2@95.15,62.4 ; D12.2@95.15,62.4 96.5,63.75 99.3,63.75 D13.2@100.65,62.4
  Bottom Layer w0.5: U3a.5@22.2,29.865 U3a.4@22.2,31.135 U3a.3@22.2,32.405 22.15,32.455 21.295,32.455 18.855,34.895 16.85,34.895 U3a.16@16.8,34.945 18.695,34.945 21.7,37.95 21.7,39.231 25.719,43.25 v1(43,43.25) ; v1(42.9,47.5) 43,47.6 71.4,47.6 72.75,46.25 ; v1(43,37.25) 43,34.995 U2a.16@43.05,34.945 43.1,34.895 44.485,34.895 46.925,32.455 48.4,32.455 U2a.3@48.45,32.405 U2a.4@48.45,31.135 U2a.5@48.45,29.865 ; U5.3@66.515,38.55 U5.3@66.465,38.5 66.465,40.715 67.75,42 71.75,42 72.75,43 72.75,46.25 ; U6.1@85.75,37.71 89.135,37.71 88.9,37.475 88.9,36.6 90.775,34.725 94.225,34.725 95.75,36.25 95.75,44 ; 95.875,43.875 95.75,44 ; v1(106.325,61.975) 106.344,61.956 106.344,61.406 108,59.75 108,53 106.75,51.75 103.5,51.75 102.875,51.125 102.6,51.4 D2.1@102.6,50.3 D2.1@102.6,49.99 ; J3.1@110.8,49.3 110.75,49.35 106.15,49.35 X1.1@106.1,49.4 103.19,49.4 D2.1@102.6,49.99 ; 72.75,46.25 72.75,46.5 74,47.75 92,47.75 95.75,44 ; 95.75,44 101.25,49.5 102.36,49.5 102.6,49.74 D2.1@102.6,49.99
+12: C3.2 D1.1 D15.2 D16.2 D17.2 D18.2 D19.2 D20.2 D35.2 D36.2 D37.2 D38.2 D39.2 D40.2 D41.2 D.2 J2.2 X2.1 | length 215.3
  Top Layer w0.5: D35.2@4,26.3 4,27.457 3.707,27.75 3.25,27.75 ; D36.2@5.8,14.25 3.25,14.25 2.5,15 2.5,27 3.25,27.75 ; D40.2@15.8,28.3 18.55,28.3 19.25,29 ; D37.2@17.8,16.3 D37.2@17.9,16.3 ; D.2@20.5,26.3 19.2,25 19.2,17.6 D37.2@17.9,16.3 ; D.2@20.6,26.3 20.6,27.65 19.25,29 ; D20.2@20.6,40.3 20.2,40.3 19.25,39.35 ; D15.2@22.5,14.25 19.95,14.25 D37.2@17.9,16.3 ; D19.2@32.5,28.3 34.8,28.3 ; D16.2@34.55,16.7 34.65,16.7 36,18.05 36,27.1 34.8,28.3 ; v1(41.25,39) 37,39 ; 3.25,27.75 2.5,28.5 2.5,39.5 3.3,40.3 D41.2@4,40.3 4,42.228 5.462,43.69 14.56,43.69 15.8,42.45 D39.2@15.8,42.35 17.15,42.35 ; 17.15,42.35 18.49,43.69 31.26,43.69 32.5,42.45 D18.2@32.5,42.35 33.4,42.35 34.45,41.3 D17.2@34.45,40.3 35.7,40.3 37,39 ; 17.15,42.35 18.05,41.45 18.05,40.45 D38.2@18.2,40.3 18.3,40.3 19.25,39.35 ; 19.25,29 19.25,39.35 ; 34.8,28.3 36,29.5 36,38 37,39
  Bottom Layer w0.5: v1(41.25,39) 53,39 55.797,36.203 65.685,36.203 65.732,36.25 68.553,36.25 71.753,33.05 98.275,33.05 C3.2@98.5,33.275 102.325,33.275 D1.1@102.5,33.1 102.5,33.61 103.09,34.2 X2.1@105.8,34.2 105.82,34.18 110.68,34.18 J2.2@110.7,34.16